# EAGLE board Pi_Block-GiantPanel-v10 (EAGLE 6.6.0), part 1 of 11
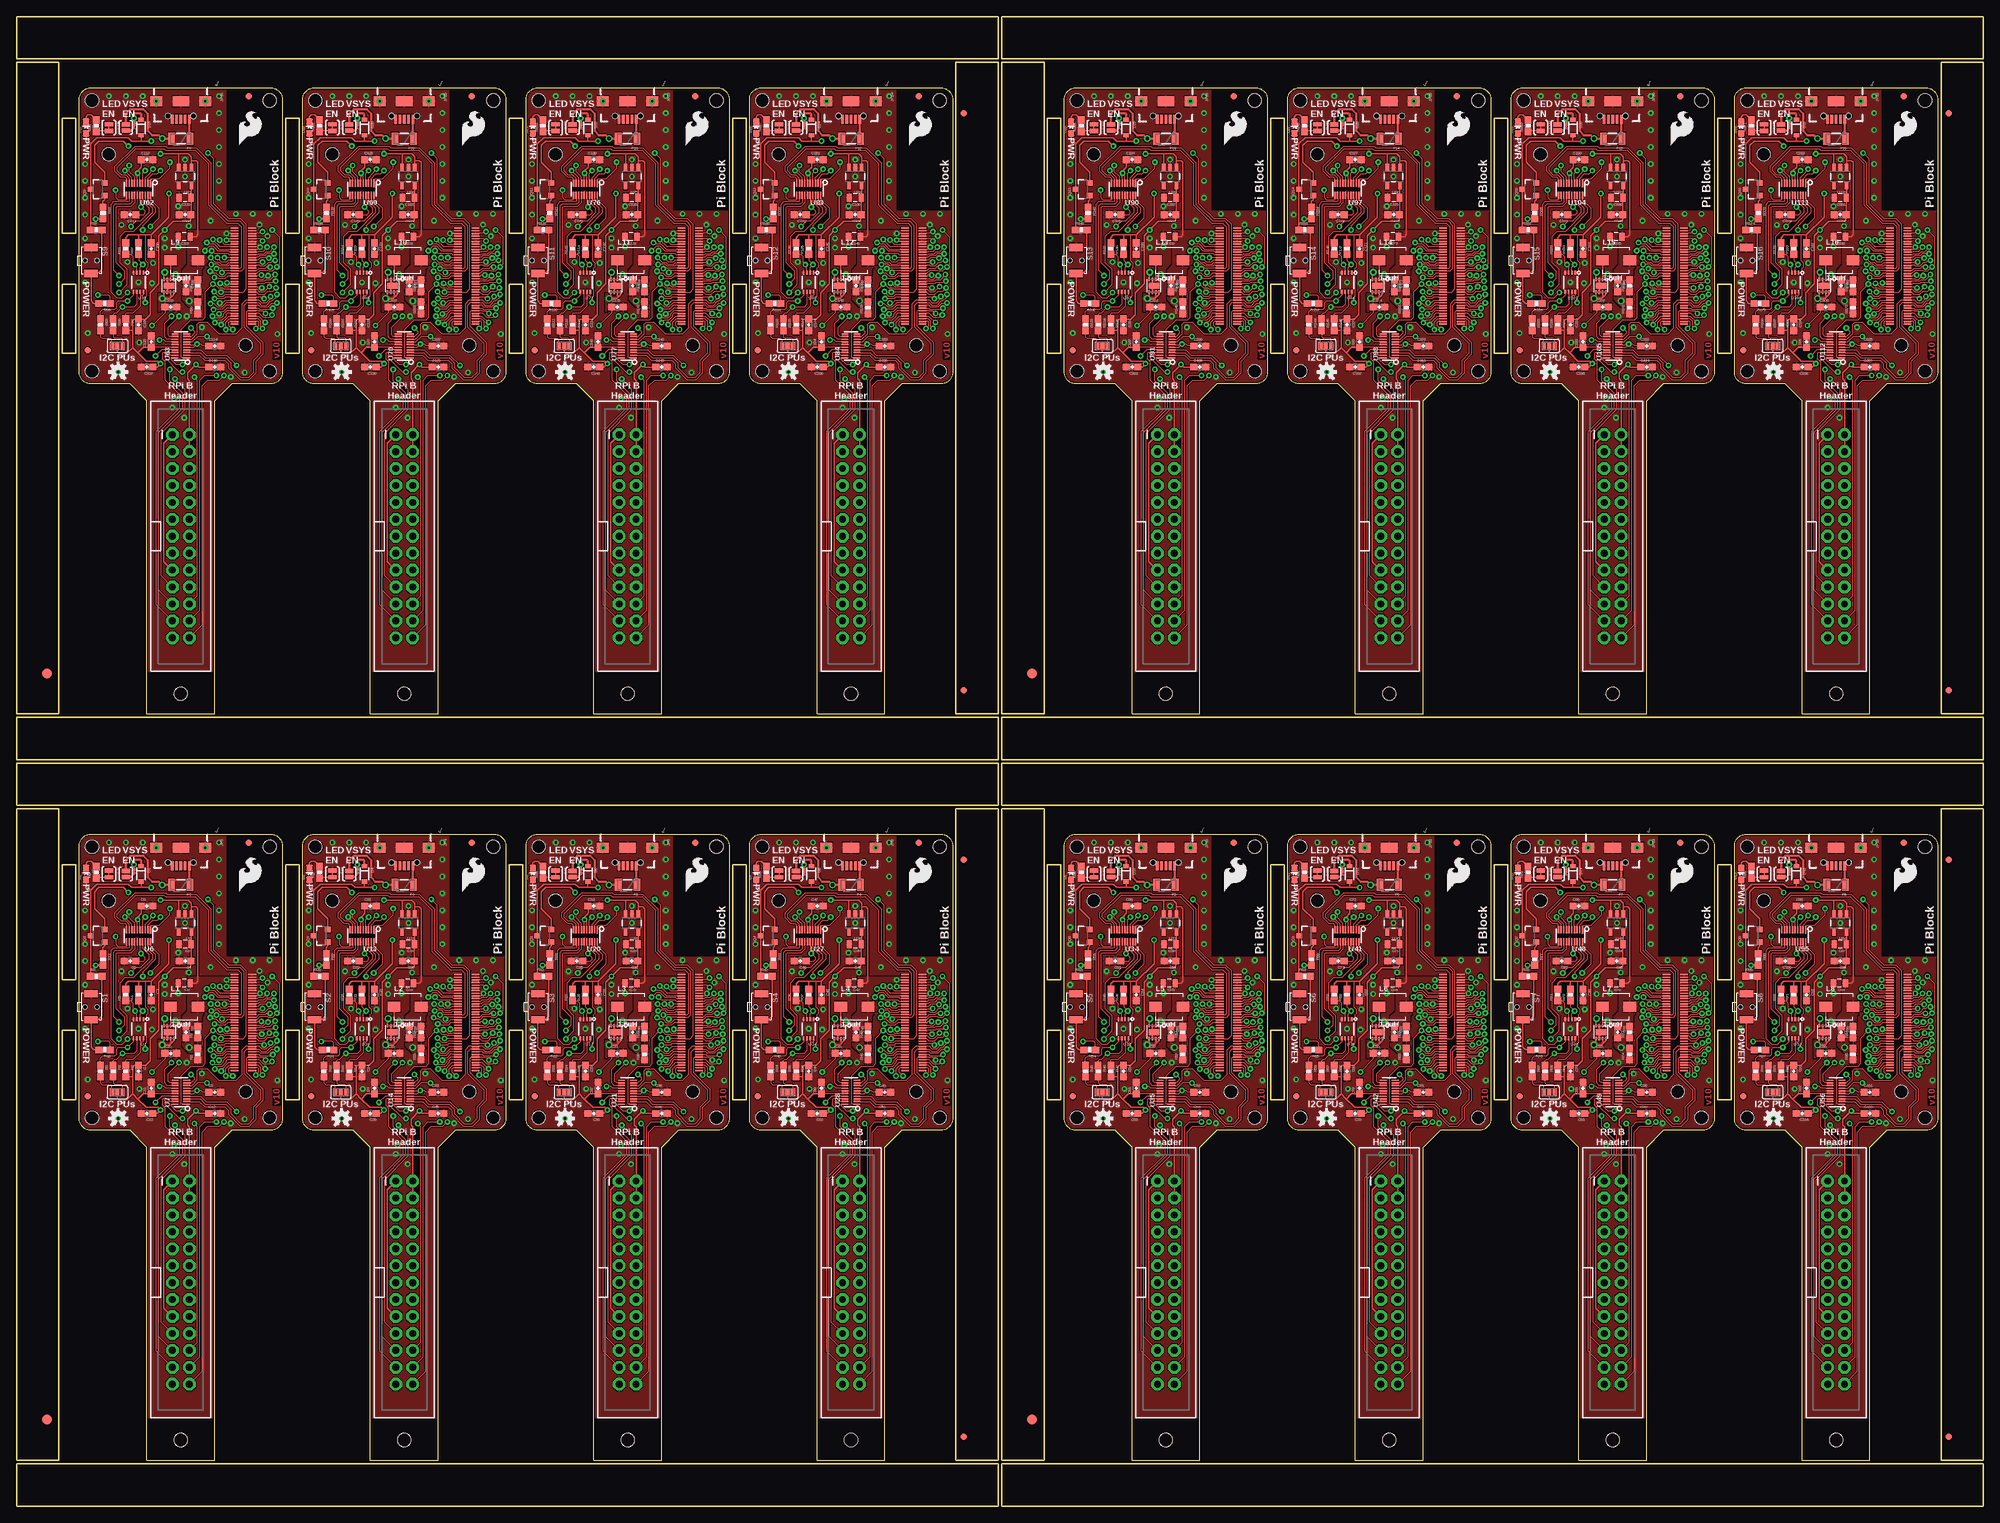
[diagram p0: board, top side]
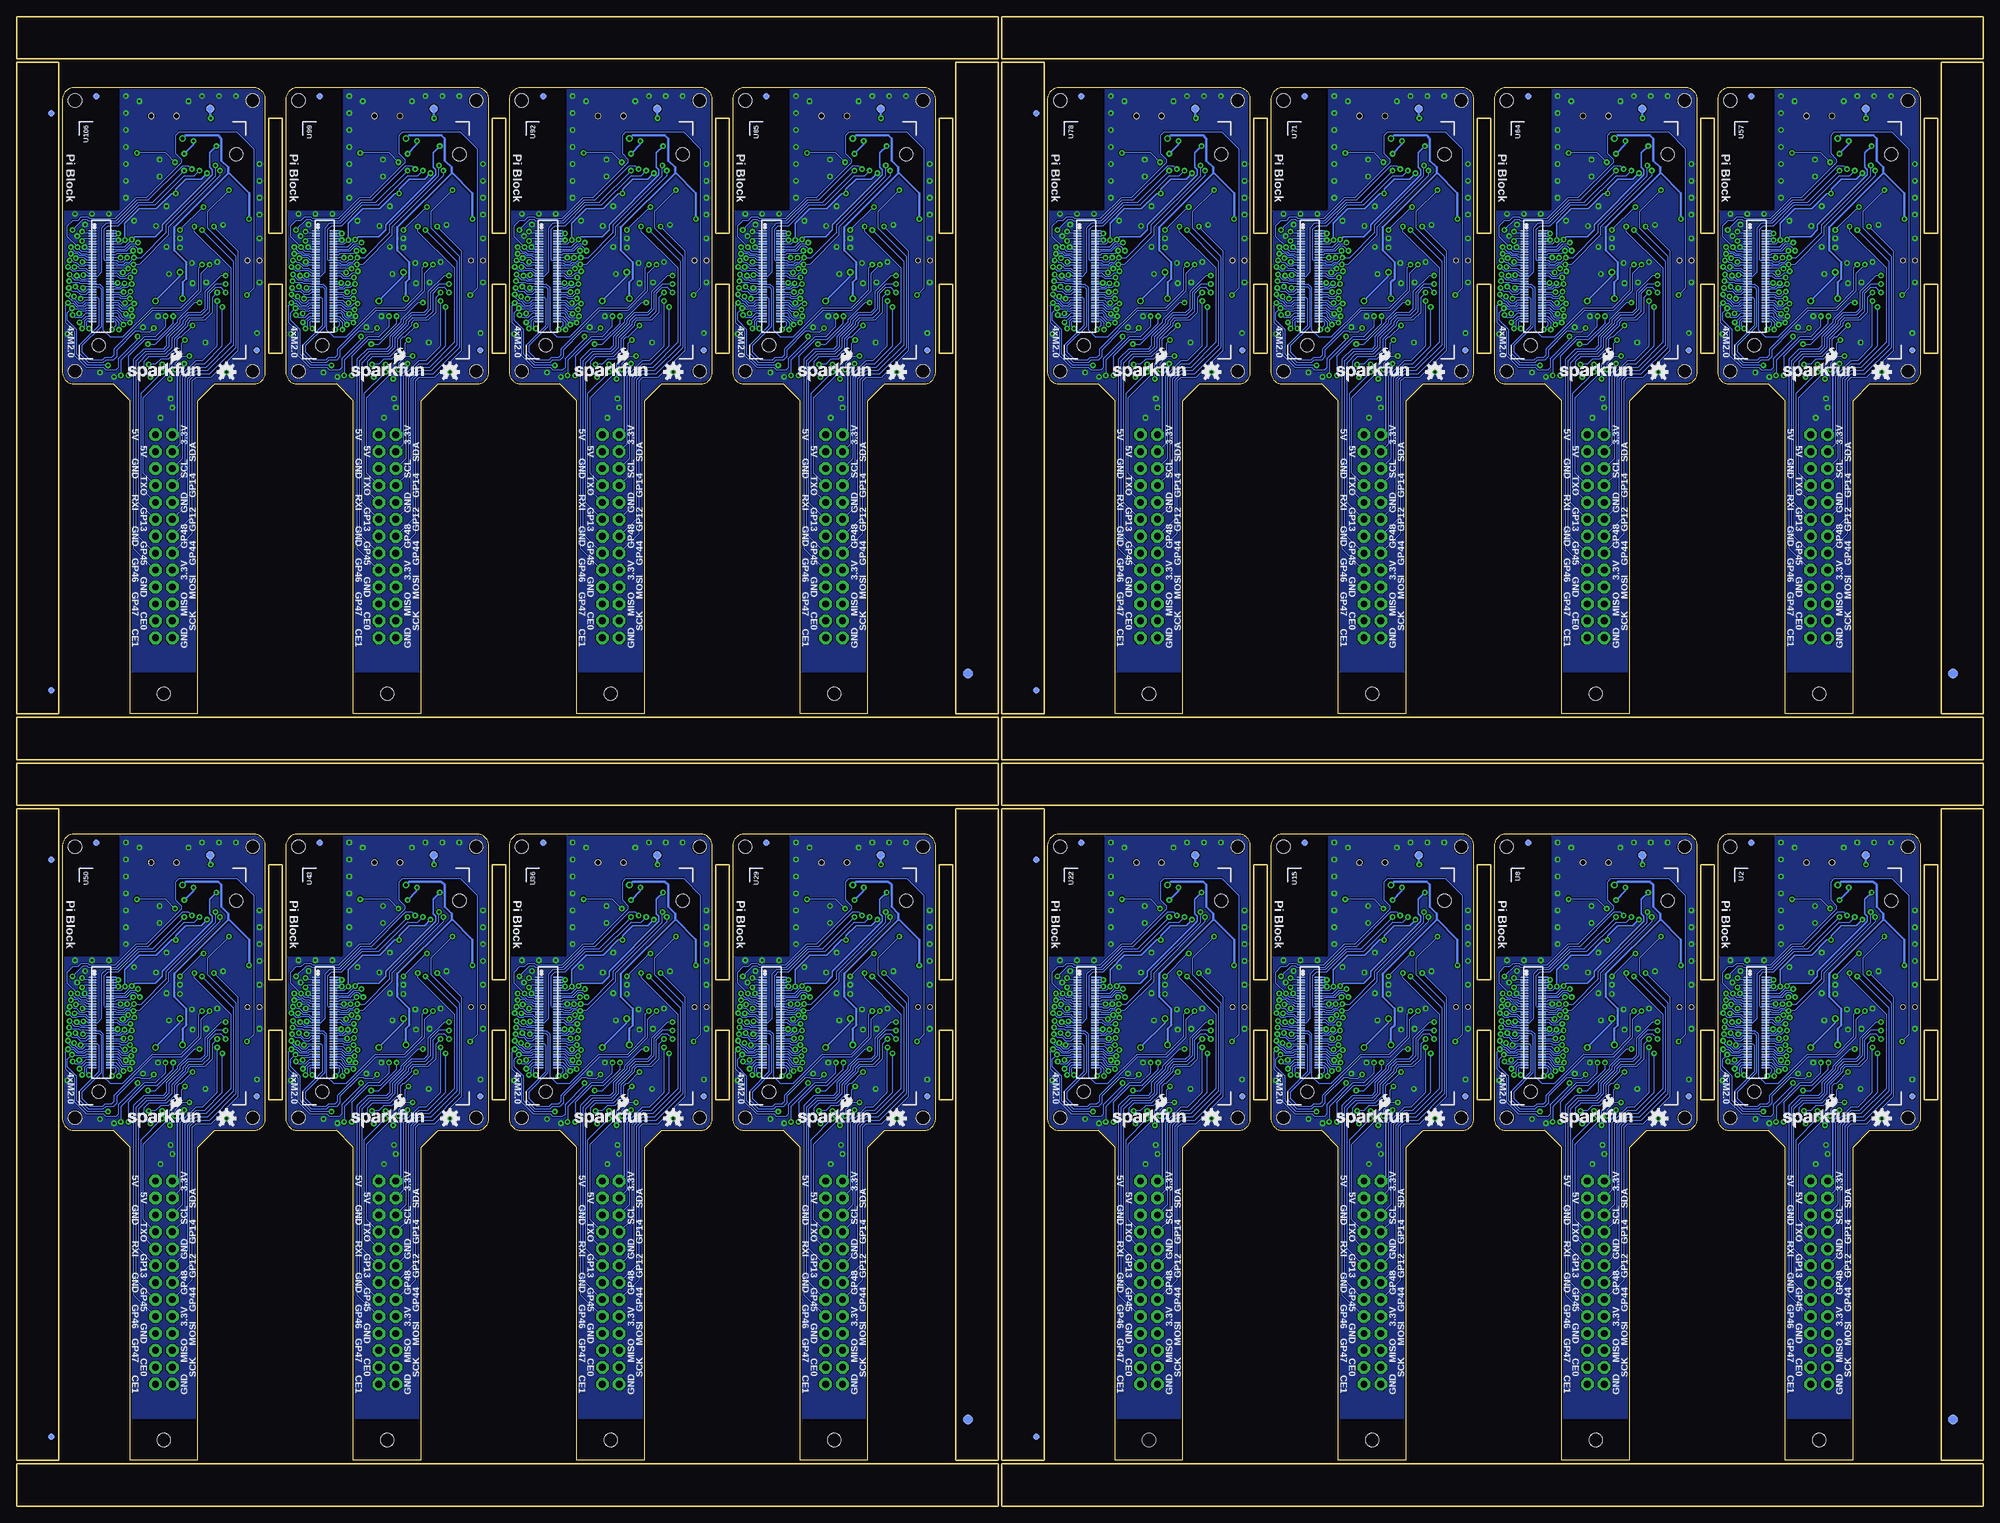
[diagram p1: board, bottom side, seen from below]

Size 295.15 x 223.52 mm. Coordinates in mm from the lower left corner, seen from the top.
Outline: 6.35,82.3 6.35,6.86 0,6.86 0,32.77
Outline: 0,28.45 0,104.65 6.35,104.65 6.35,77.98
Outline: 154.18,82.3 154.18,6.86 147.83,6.86 147.83,32.77
Outline: 147.83,28.45 147.83,104.65 154.18,104.65 154.18,77.98
Outline: 6.35,194.31 6.35,118.87 0,118.87 0,144.78
Outline: 0,140.46 0,216.66 6.35,216.66 6.35,189.99
Outline: 154.18,194.31 154.18,118.87 147.83,118.87 147.83,144.78
Outline: 147.83,140.46 147.83,216.66 154.18,216.66 154.18,189.99
Outline: 39.88,99.06 39.88,58.17 arc-90 38.1,56.39 32.26,56.39 29.72,53.85 29.72,6.86 19.56,6.86 19.56,53.85 17.02,56.39 11.18,56.39 arc-90 9.4,58.17 9.4,99.06 arc-90 11.18,100.84 38.1,100.84 arc-90 39.88,99.06
Outline: 73.41,99.06 73.41,58.17 arc-90 71.63,56.39 65.79,56.39 63.25,53.85 63.25,6.86 53.09,6.86 53.09,53.85 50.55,56.39 44.7,56.39 arc-90 42.93,58.17 42.93,99.06 arc-90 44.7,100.84 71.63,100.84 arc-90 73.41,99.06
Outline: 106.93,99.06 106.93,58.17 arc-90 105.16,56.39 99.31,56.39 96.77,53.85 96.77,6.86 86.61,6.86 86.61,53.85 84.07,56.39 78.23,56.39 arc-90 76.45,58.17 76.45,99.06 arc-90 78.23,100.84 105.16,100.84 arc-90 106.93,99.06
Outline: 140.46,99.06 140.46,58.17 arc-90 138.68,56.39 132.84,56.39 130.3,53.85 130.3,6.86 120.14,6.86 120.14,53.85 117.6,56.39 111.76,56.39 arc-90 109.98,58.17 109.98,99.06 arc-90 111.76,100.84 138.68,100.84 arc-90 140.46,99.06
Outline: 0,0 147.32,0 147.32,6.35 0,6.35 0,0
Outline: 140.97,104.65 140.97,6.86 147.32,6.86 147.32,104.65 140.97,104.65
Outline: 147.32,111.51 0,111.51 0,105.16 147.32,105.16 147.32,111.51
Outline: 8.89,96.27 6.86,96.27 6.86,78.99 8.89,78.99 8.89,96.27
Outline: 42.42,96.27 40.39,96.27 40.39,78.99 42.42,78.99 42.42,96.27
Outline: 75.95,96.27 73.91,96.27 73.91,78.99 75.95,78.99 75.95,96.27
Outline: 109.47,96.27 107.44,96.27 107.44,78.99 109.47,78.99 109.47,96.27
Outline: 6.86,60.96 8.89,60.96 8.89,71.37 6.86,71.37 6.86,60.96
Outline: 40.39,60.96 42.42,60.96 42.42,71.37 40.39,71.37 40.39,60.96
Outline: 73.91,60.96 75.95,60.96 75.95,71.37 73.91,71.37 73.91,60.96
Outline: 107.44,60.96 109.47,60.96 109.47,71.37 107.44,71.37 107.44,60.96
Outline: 187.71,99.06 187.71,58.17 arc-90 185.93,56.39 180.09,56.39 177.55,53.85 177.55,6.86 167.39,6.86 167.39,53.85 164.85,56.39 159,56.39 arc-90 157.23,58.17 157.23,99.06 arc-90 159,100.84 185.93,100.84 arc-90 187.71,99.06
Outline: 221.23,99.06 221.23,58.17 arc-90 219.46,56.39 213.61,56.39 211.07,53.85 211.07,6.86 200.91,6.86 200.91,53.85 198.37,56.39 192.53,56.39 arc-90 190.75,58.17 190.75,99.06 arc-90 192.53,100.84 219.46,100.84 arc-90 221.23,99.06
Outline: 254.76,99.06 254.76,58.17 arc-90 252.98,56.39 247.14,56.39 244.6,53.85 244.6,6.86 234.44,6.86 234.44,53.85 231.9,56.39 226.06,56.39 arc-90 224.28,58.17 224.28,99.06 arc-90 226.06,100.84 252.98,100.84 arc-90 254.76,99.06
Outline: 288.29,99.06 288.29,58.17 arc-90 286.51,56.39 280.67,56.39 278.13,53.85 278.13,6.86 267.97,6.86 267.97,53.85 265.43,56.39 259.59,56.39 arc-90 257.81,58.17 257.81,99.06 arc-90 259.59,100.84 286.51,100.84 arc-90 288.29,99.06
Outline: 147.83,0 295.15,0 295.15,6.35 147.83,6.35 147.83,0
Outline: 288.8,104.65 288.8,6.86 295.15,6.86 295.15,104.65 288.8,104.65
Outline: 295.15,111.51 147.83,111.51 147.83,105.16 295.15,105.16 295.15,111.51
Outline: 156.72,96.27 154.69,96.27 154.69,78.99 156.72,78.99 156.72,96.27
Outline: 190.25,96.27 188.21,96.27 188.21,78.99 190.25,78.99 190.25,96.27
Outline: 223.77,96.27 221.74,96.27 221.74,78.99 223.77,78.99 223.77,96.27
Outline: 257.3,96.27 255.27,96.27 255.27,78.99 257.3,78.99 257.3,96.27
Outline: 154.69,60.96 156.72,60.96 156.72,71.37 154.69,71.37 154.69,60.96
Outline: 188.21,60.96 190.25,60.96 190.25,71.37 188.21,71.37 188.21,60.96
Outline: 221.74,60.96 223.77,60.96 223.77,71.37 221.74,71.37 221.74,60.96
Outline: 255.27,60.96 257.3,60.96 257.3,71.37 255.27,71.37 255.27,60.96
Outline: 39.88,211.07 39.88,170.18 arc-90 38.1,168.4 32.26,168.4 29.72,165.86 29.72,118.87 19.56,118.87 19.56,165.86 17.02,168.4 11.18,168.4 arc-90 9.4,170.18 9.4,211.07 arc-90 11.18,212.85 38.1,212.85 arc-90 39.88,211.07
Outline: 73.41,211.07 73.41,170.18 arc-90 71.63,168.4 65.79,168.4 63.25,165.86 63.25,118.87 53.09,118.87 53.09,165.86 50.55,168.4 44.7,168.4 arc-90 42.93,170.18 42.93,211.07 arc-90 44.7,212.85 71.63,212.85 arc-90 73.41,211.07
Outline: 106.93,211.07 106.93,170.18 arc-90 105.16,168.4 99.31,168.4 96.77,165.86 96.77,118.87 86.61,118.87 86.61,165.86 84.07,168.4 78.23,168.4 arc-90 76.45,170.18 76.45,211.07 arc-90 78.23,212.85 105.16,212.85 arc-90 106.93,211.07
Outline: 140.46,211.07 140.46,170.18 arc-90 138.68,168.4 132.84,168.4 130.3,165.86 130.3,118.87 120.14,118.87 120.14,165.86 117.6,168.4 111.76,168.4 arc-90 109.98,170.18 109.98,211.07 arc-90 111.76,212.85 138.68,212.85 arc-90 140.46,211.07
Outline: 0,112.01 147.32,112.01 147.32,118.36 0,118.36 0,112.01
Outline: 140.97,216.66 140.97,118.87 147.32,118.87 147.32,216.66 140.97,216.66
Outline: 147.32,223.52 0,223.52 0,217.17 147.32,217.17 147.32,223.52
Outline: 8.89,208.28 6.86,208.28 6.86,191.01 8.89,191.01 8.89,208.28
Outline: 42.42,208.28 40.39,208.28 40.39,191.01 42.42,191.01 42.42,208.28
Outline: 75.95,208.28 73.91,208.28 73.91,191.01 75.95,191.01 75.95,208.28
Outline: 109.47,208.28 107.44,208.28 107.44,191.01 109.47,191.01 109.47,208.28
Outline: 6.86,172.97 8.89,172.97 8.89,183.39 6.86,183.39 6.86,172.97
Outline: 40.39,172.97 42.42,172.97 42.42,183.39 40.39,183.39 40.39,172.97
Outline: 73.91,172.97 75.95,172.97 75.95,183.39 73.91,183.39 73.91,172.97
Outline: 107.44,172.97 109.47,172.97 109.47,183.39 107.44,183.39 107.44,172.97
Outline: 187.71,211.07 187.71,170.18 arc-90 185.93,168.4 180.09,168.4 177.55,165.86 177.55,118.87 167.39,118.87 167.39,165.86 164.85,168.4 159,168.4 arc-90 157.23,170.18 157.23,211.07 arc-90 159,212.85 185.93,212.85 arc-90 187.71,211.07
Outline: 221.23,211.07 221.23,170.18 arc-90 219.46,168.4 213.61,168.4 211.07,165.86 211.07,118.87 200.91,118.87 200.91,165.86 198.37,168.4 192.53,168.4 arc-90 190.75,170.18 190.75,211.07 arc-90 192.53,212.85 219.46,212.85 arc-90 221.23,211.07
Outline: 254.76,211.07 254.76,170.18 arc-90 252.98,168.4 247.14,168.4 244.6,165.86 244.6,118.87 234.44,118.87 234.44,165.86 231.9,168.4 226.06,168.4 arc-90 224.28,170.18 224.28,211.07 arc-90 226.06,212.85 252.98,212.85 arc-90 254.76,211.07
Outline: 288.29,211.07 288.29,170.18 arc-90 286.51,168.4 280.67,168.4 278.13,165.86 278.13,118.87 267.97,118.87 267.97,165.86 265.43,168.4 259.59,168.4 arc-90 257.81,170.18 257.81,211.07 arc-90 259.59,212.85 286.51,212.85 arc-90 288.29,211.07
Outline: 147.83,112.01 295.15,112.01 295.15,118.36 147.83,118.36 147.83,112.01
Outline: 288.8,216.66 288.8,118.87 295.15,118.87 295.15,216.66 288.8,216.66
Outline: 295.15,223.52 147.83,223.52 147.83,217.17 295.15,217.17 295.15,223.52
Outline: 156.72,208.28 154.69,208.28 154.69,191.01 156.72,191.01 156.72,208.28
Outline: 190.25,208.28 188.21,208.28 188.21,191.01 190.25,191.01 190.25,208.28
Outline: 223.77,208.28 221.74,208.28 221.74,191.01 223.77,191.01 223.77,208.28
Outline: 257.3,208.28 255.27,208.28 255.27,191.01 257.3,191.01 257.3,208.28
Outline: 154.69,172.97 156.72,172.97 156.72,183.39 154.69,183.39 154.69,172.97
Outline: 188.21,172.97 190.25,172.97 190.25,183.39 188.21,183.39 188.21,172.97
Outline: 221.74,172.97 223.77,172.97 223.77,183.39 221.74,183.39 221.74,172.97
Outline: 255.27,172.97 257.3,172.97 257.3,183.39 255.27,183.39 255.27,172.97
Copper layers (1*16): Top 0.035mm / dielectric 1.5mm / Bottom 0.035mm
Design rules "Pi_Block *": minimum track width 6mil, minimum drill 13mil, track to track 6mil, track to pad 6mil, pad to pad 6mil, via to via 6mil, smd to smd 6mil, copper to edge 6mil, drill to drill 6mil, minimum pad ring 12mil, minimum via ring 10mil, stop-mask expansion 4mil, vias tented up to drill 20mil, thermal gap 6mil
Holes 2 mm at 37.97,58.29 11.3,58.29 11.3,98.93 37.97,98.93 24.64,9.91 71.5,58.29 44.83,58.29 44.83,98.93 71.5,98.93 58.17,9.91 105.03,58.29 78.36,58.29 78.36,98.93 105.03,98.93 91.69,9.91 138.56,58.29 111.89,58.29 111.89,98.93 138.56,98.93 125.22,9.91 185.8,58.29 159.13,58.29 159.13,98.93 185.8,98.93 172.47,9.91 219.33,58.29 192.66,58.29 192.66,98.93 219.33,98.93 205.99,9.91 252.86,58.29 226.19,58.29 226.19,98.93 252.86,98.93 239.52,9.91 286.38,58.29 259.71,58.29 259.71,98.93 286.38,98.93 273.05,9.91 37.97,170.31 11.3,170.31 11.3,210.95 37.97,210.95 24.64,121.92 71.5,170.31 44.83,170.31 44.83,210.95 71.5,210.95 58.17,121.92 105.03,170.31 78.36,170.31 78.36,210.95 105.03,210.95 91.69,121.92 138.56,170.31 111.89,170.31 111.89,210.95 138.56,210.95 125.22,121.92 185.8,170.31 159.13,170.31 159.13,210.95 185.8,210.95 172.47,121.92 219.33,170.31 192.66,170.31 192.66,210.95 219.33,210.95 205.99,121.92 252.86,170.31 226.19,170.31 226.19,210.95 252.86,210.95 239.52,121.92 286.38,170.31 259.71,170.31 259.71,210.95 286.38,210.95 273.05,121.92
tRestrict: area 31.5,82.5 to 39.9,100.8; area 65,82.5 to 73.4,100.8; area 98.6,82.5 to 106.9,100.8; area 132.1,82.5 to 140.5,100.8; area 179.3,82.5 to 187.7,100.8; area 212.9,82.5 to 221.2,100.8; area 246.4,82.5 to 254.8,100.8; area 279.9,82.5 to 288.3,100.8; area 31.5,194.6 to 39.9,212.9; area 65,194.6 to 73.4,212.9; area 98.6,194.6 to 106.9,212.9; area 132.1,194.6 to 140.5,212.9; area 179.3,194.6 to 187.7,212.9; area 212.9,194.6 to 221.2,212.9; area 246.4,194.6 to 254.8,212.9; area 279.9,194.6 to 288.3,212.9; 208 lines
bRestrict: area 31.5,82.5 to 39.9,100.8; area 65,82.5 to 73.4,100.8; area 98.6,82.5 to 106.9,100.8; area 132.1,82.5 to 140.5,100.8; area 179.3,82.5 to 187.7,100.8; area 212.9,82.5 to 221.2,100.8; area 246.4,82.5 to 254.8,100.8; area 279.9,82.5 to 288.3,100.8; area 31.5,194.6 to 39.9,212.9; area 65,194.6 to 73.4,212.9; area 98.6,194.6 to 106.9,212.9; area 132.1,194.6 to 140.5,212.9; area 179.3,194.6 to 187.7,212.9; area 212.9,194.6 to 221.2,212.9; area 246.4,194.6 to 254.8,212.9; area 279.9,194.6 to 288.3,212.9; 48 lines

## Footprints (pad centres in the part's own frame; a part is rotated, then mirrored left to right if it is on the bottom)
0603-CAP = smd 1.1 x 1: 1 -0.85,0; 2 0.85,0
0805 = smd 0.8 x 1.2: 1 -0.9,0; 2 0.9,0
SOD-323 = smd 0.63 x 0.83: A 1.15,0; C -1.15,0
LED-0603 = smd 1 x 1: A 0,-0.877; C 0,0.877
FIDUCIAL-1.5X3 = smd 1.5 x 1.5: 1 0,0
FIDUCIAL-1X2 = smd 1 x 1: 1 0,0
PTC-1206 = smd 1 x 1.8: 1 -1.4,0; 2 1.4,0
2X13-SHROUDED = drill 1.016 pad 1.88 octagon: 1 -1.27,15.24; 2 1.27,15.24; 3 -1.27,12.7; 4 1.27,12.7; 5 -1.27,10.16; 6 1.27,10.16; 7 -1.27,7.62; 8 1.27,7.62; 9 -1.27,5.08; 10 1.27,5.08; 11 -1.27,2.54; 12 1.27,2.54; 13 -1.27,0; 14 1.27,0; 15 -1.27,-2.54; 16 1.27,-2.54; 17 -1.27,-5.08; 18 1.27,-5.08; 19 -1.27,-7.62; 20 1.27,-7.62; 21 -1.27,-10.16; 22 1.27,-10.16; 23 -1.27,-12.7; 24 1.27,-12.7; 25 -1.27,-15.24; 26 1.27,-15.24
USB-B-MICRO-SMD_V03 = smd 1.4 x 0.4: D+1 2.7,0; D-1 2.7,0.65; GND1 2.7,-1.3; ID1 2.7,-0.65; VBUS1 2.7,1.3 | smd 1.5 x 1.8: SHIELD1 0,3.7; SHIELD2 0,-3.7 | smd 1.5 x 2.5: SHIELD3 0,0 | hole 0.85: 2.2,1.9; 2.2,-1.9
INDUCTOR-SRP4020 = smd 1.9 x 1.5: P$1 -2.05,0; P$2 2.05,0
SOT23-3 = smd 0.8 x 0.9: 1 -0.95,-1; 2 0.95,-1; 3 0,1.1
0603-RES = smd 1.1 x 1: 1 -0.85,0; 2 0.85,0
TACTILE_SWITCH-SMD-RIGHT-ANGLE = smd 1.1 x 2: 1 -1.95,0; 2 1.95,0 | hole 0.7: 0,0.9; 0,-0.9
PAD-JUMPER-2-NO_YES_SILK = smd 0.635 x 1.27: 1 -0.45,0; 2 0.45,0
PAD-JUMPER-3-NC_BY_PASTE_YES_SILK_FULL_BOX = smd 0.635 x 1.27: 1 -0.813,0; 2 0,0; 3 0.813,0
PAD-JUMPER-2-NC_BY_TRACE_YES_SILK = smd 0.635 x 1.27: 1 -0.508,0; 2 0.508,0
PAD.03X.05 = smd 1.27 x 1.27: P$1 0,0
PCA9306DC-1:1 = smd 0.25 x 0.602: 1 -0.73,-1.446; 2 -0.23,-1.446; 3 0.27,-1.446; 4 0.77,-1.446; 5 0.77,1.431; 6 0.27,1.431; 7 -0.23,1.431; 8 -0.73,1.431
EDISON_DAUGHTER = smd 1.14 x 0.2: 1 1.98,19.17; 2 4.62,19.17; 3 1.98,18.77; 4 4.62,18.77; 5 1.98,18.37; 6 4.62,18.37; 7 1.98,17.97; 8 4.62,17.97; 9 1.98,17.57; 10 4.62,17.57; 11 1.98,17.17; 12 4.62,17.17; 13 1.98,16.77; 14 4.62,16.77; 15 1.98,16.37; 16 4.62,16.37; 17 1.98,15.97; 18 4.62,15.97; 19 1.98,15.57; 20 4.62,15.57; 21 1.98,15.17; 22 4.62,15.17; 23 1.98,14.77; 24 4.62,14.77; 25 1.98,14.37; 26 4.62,14.37; 27 1.98,13.97; 28 4.62,13.97; 29 1.98,13.57; 30 4.62,13.57; 31 1.98,13.17; 32 4.62,13.17; 33 1.98,12.77; 34 4.62,12.77; 35 1.98,12.37; 36 4.62,12.37; 37 1.98,11.97; 38 4.62,11.97; 39 1.98,11.57; 40 4.62,11.57; 41 1.98,11.17; 42 4.62,11.17; 43 1.98,10.77; 44 4.62,10.77; 45 1.98,10.37; 46 4.62,10.37; 47 1.98,9.97; 48 4.62,9.97; 49 1.98,9.57; 50 4.62,9.57; 51 1.98,9.17; 52 4.62,9.17; 53 1.98,8.77; 54 4.62,8.77; 55 1.98,8.37; 56 4.62,8.37; 57 1.98,7.97; 58 4.62,7.97; 59 1.98,7.57; 60 4.62,7.57; 61 1.98,7.17; 62 4.62,7.17; 63 1.98,6.77; 64 4.62,6.77; 65 1.98,6.37; 66 4.62,6.37; 67 1.98,5.97; 68 4.62,5.97; 69 1.98,5.57; 70 4.62,5.57 | hole 2: 23.53,30.67; 2.93,1.98
DF40C-70DP-0.4(51) = smd 0.2 x 1.14 bottom: 1 6.8,1.32; 2 6.8,-1.32; 3 6.4,1.32; 4 6.4,-1.32; 5 6,1.32; 6 6,-1.32; 7 5.6,1.32; 8 5.6,-1.32; 9 5.2,1.32; 10 5.2,-1.32; 11 4.8,1.32; 12 4.8,-1.32; 13 4.4,1.32; 14 4.4,-1.32; 15 4,1.32; 16 4,-1.32; 17 3.6,1.32; 18 3.6,-1.32; 19 3.2,1.32; 20 3.2,-1.32; 21 2.8,1.32; 22 2.8,-1.32; 23 2.4,1.32; 24 2.4,-1.32; 25 2,1.32; 26 2,-1.32; 27 1.6,1.32; 28 1.6,-1.32; 29 1.2,1.32; 30 1.2,-1.32; 31 0.8,1.32; 32 0.8,-1.32; 33 0.4,1.32; 34 0.4,-1.32; 35 0,1.32; 36 0,-1.32; 37 -0.4,1.32; 38 -0.4,-1.32; 39 -0.8,1.32; 40 -0.8,-1.32; 41 -1.2,1.32; 42 -1.2,-1.32; 43 -1.6,1.32; 44 -1.6,-1.32; 45 -2,1.32; 46 -2,-1.32; 47 -2.4,1.32; 48 -2.4,-1.32; 49 -2.8,1.32; 50 -2.8,-1.32; 51 -3.2,1.32; 52 -3.2,-1.32; 53 -3.6,1.32; 54 -3.6,-1.32; 55 -4,1.32; 56 -4,-1.32; 57 -4.4,1.32; 58 -4.4,-1.32; 59 -4.8,1.32; 60 -4.8,-1.32; 61 -5.2,1.32; 62 -5.2,-1.32; 63 -5.6,1.32; 64 -5.6,-1.32; 65 -6,1.32; 66 -6,-1.32; 67 -6.4,1.32; 68 -6.4,-1.32; 69 -6.8,1.32; 70 -6.8,-1.32; NC1 7.2,1.32; NC2 7.2,-1.32; NC3 -7.2,-1.32; NC4 -7.2,1.32
WSON-8-PAD = smd 0.25 x 0.5: 1 -0.75,-0.95; 2 -0.25,-0.95; 3 0.25,-0.95; 4 0.75,-0.95; 5 0.75,0.95; 6 0.25,0.95; 7 -0.25,0.95; 8 -0.75,0.95 | smd 1.6 x 0.9: PAD 0,0
SOT23-5 = smd 0.55 x 1.2: 1 -0.95,-1.3; 2 0,-1.3; 3 0.95,-1.3; 4 0.95,1.3; 5 -0.95,1.3
UFDFN-20 = smd 0.2 x 1.1: 1 -1.8,-0.85 | smd 0.2 x 1: 2 -1.4,-0.9; 3 -1,-0.9; 4 -0.6,-0.9; 5 -0.2,-0.9; 6 0.2,-0.9; 7 0.6,-0.9; 8 1,-0.9; 9 1.4,-0.9; 10 1.8,-0.9; 11 1.8,0.9; 12 1.4,0.9; 13 1,0.9; 14 0.6,0.9; 15 0.2,0.9; 16 -0.2,0.9; 17 -0.6,0.9; 18 -1,0.9; 19 -1.4,0.9; 20 -1.8,0.9